# EAGLE board MCU board ATmega328p v2.4 (EAGLE 9.2.0)

Size 160 x 100 mm. Coordinates in mm from the lower left corner, seen from the top.
Outline: 0,0 160,0 160,100 0,100 0,0
Copper layers (1*2*3*4): Top 0.035mm / dielectric 0.432mm / Route2 0.017mm / dielectric 0.432mm / Route3 0.017mm / dielectric 0.432mm / Route4 0.035mm
Design rules "JLC_4L_ACM_CAN": minimum track width 8mil, minimum drill 20mil, track to track 8mil, track to pad 8mil, pad to pad 8mil, via to via 8mil, smd to smd 8mil, copper to edge 10mil, drill to drill 8mil, minimum pad ring 12mil, minimum via ring 10mil, stop-mask expansion 4mil, vias tented up to drill 25mil, thermal gap 10mil

## Footprints (pad centres in the part's own frame; a part is rotated, then mirrored left to right if it is on the bottom)
2,54/1,0 = drill 1.016 pad 2.54 octagon: 1 0,0
C0603 = smd 1.1 x 1: 1 -0.85,0; 2 0.85,0
0154001.DRT = smd 4.242 x 3.81: 1 -3.188,0; 2 3.188,0
QFN45P400X400X100-29N = smd 0.7 x 0.25: 1 -2.05,1.35; 2 -2.05,0.9; 3 -2.05,0.45; 4 -2.05,0; 5 -2.05,-0.45; 6 -2.05,-0.9; 7 -2.05,-1.35; 15 2.05,-1.35; 16 2.05,-0.9; 17 2.05,-0.45; 18 2.05,0; 19 2.05,0.45; 20 2.05,0.9; 21 2.05,1.35 | smd 0.25 x 0.7: 8 -1.35,-2.05; 9 -0.9,-2.05; 10 -0.45,-2.05; 11 0,-2.05; 12 0.45,-2.05; 13 0.9,-2.05; 14 1.35,-2.05; 22 1.35,2.05; 23 0.9,2.05; 24 0.45,2.05; 25 0,2.05; 26 -0.45,2.05; 27 -0.9,2.05; 28 -1.35,2.05 | smd 2.45 x 2.45: 29 0,0
SOT230P700X170-4N = smd 1.75 x 0.95: 1 -3.15,2.3; 2 -3.15,0; 3 -3.15,-2.3 | smd 1.75 x 3.25: 4 3.15,0
QFN65P600X600X100-29N = smd 1.05 x 0.35: 1 -2.85,1.95; 2 -2.85,1.3; 3 -2.85,0.65; 4 -2.85,0; 5 -2.85,-0.65; 6 -2.85,-1.3; 7 -2.85,-1.95; 15 2.85,-1.95; 16 2.85,-1.3; 17 2.85,-0.65; 18 2.85,0; 19 2.85,0.65; 20 2.85,1.3; 21 2.85,1.95 | smd 0.35 x 1.05: 8 -1.95,-2.85; 9 -1.3,-2.85; 10 -0.65,-2.85; 11 0,-2.85; 12 0.65,-2.85; 13 1.3,-2.85; 14 1.95,-2.85; 22 1.95,2.85; 23 1.3,2.85; 24 0.65,2.85; 25 0,2.85; 26 -0.65,2.85; 27 -1.3,2.85; 28 -1.95,2.85 | smd 4.2 x 4.2: 29 0,0
2X3-NS = drill 1.016 pad 1.88: 1 -2.54,-1.27; 2 -2.54,1.27; 3 0,-1.27; 4 0,1.27; 5 2.54,-1.27; 6 2.54,1.27
ROHM-1510-(0604) = smd 0.45 x 0.45: 1 -0.675,-0.425; 3 0.675,-0.425; 4 0.675,0.425; 6 -0.675,0.425 | smd 0.4 x 0.45: 2 0,-0.425; 5 0,0.425
R0603 = smd 1 x 1.1: 1 -0.85,0; 2 0.85,0
SMD1,27-2,54 = smd 1.27 x 2.54: 1 0,0
CSTNE16M0V530000R0 = smd 0.4 x 1.9: 1 -1.2,0.425; 2 0,0.425; 3 1.2,0.425

## Placement (x,y rotation side)
12V  12V  [2,54/1,0]  -6.35,44.45 0 top  (outside the outline)
C1  0.1uF  [C0603]  -140,-158.2 0 top  (outside the outline)
C2  22pF  [C0603]  -111.4,-87.8 0 top  (outside the outline)
C3  22pF  [C0603]  -111.7,-92.7 0 top  (outside the outline)
C5  22pF  [C0603]  -72.49,-29.19 0 top  (outside the outline)
C6  0.1uF  [C0603]  -72.6,-32.7 0 top  (outside the outline)
C7  0.1uF  [C0603]  -72.6,-48.6 0 top  (outside the outline)
C8  0.1uF  [C0603]  -72.6,-53.5 0 top  (outside the outline)
C9  22pF  [C0603]  -112,-97.6 0 top  (outside the outline)
C10  10uF  [C0603]  -112.3,-102.5 0 top  (outside the outline)
C11  10uF  [C0603]  -72.6,-82.9 0 top  (outside the outline)
C12  0.1uF  [C0603]  -72.6,-58.4 0 top  (outside the outline)
C13  0.1uF  [C0603]  -72.6,-63.3 0 top  (outside the outline)
C16  0.1uF  [C0603]  -72.6,-68.2 0 top  (outside the outline)
C17  0.1uF  [C0603]  -72.6,-73.1 0 top  (outside the outline)
F1  0154005.DRT  [0154001.DRT]  13.97,46.99 0 top
GND  GND  [2,54/1,0]  -139.7,-164 0 top  (outside the outline)
I/O_AD0  I/O_AD0  [2,54/1,0]  -110.4,-82.3 0 top  (outside the outline)
I/O_AD1  I/O_AD1  [2,54/1,0]  -139,-128.2 0 top  (outside the outline)
I/O_ADC2_SDA  I/O_ADC2_SDA  [2,54/1,0]  -105.6,-82.3 0 top  (outside the outline)
I/O_ADC3_SCL  I/O_ADC3_SCL  [2,54/1,0]  -100.8,-82.3 0 top  (outside the outline)
I/O_CANH  I/O_CANH  [2,54/1,0]  -36.83,26.67 0 top  (outside the outline)
I/O_CANL  I/O_CANH  [2,54/1,0]  -43.18,26.67 0 top  (outside the outline)
I/O_PWM0  I/O_PWM0  [2,54/1,0]  -134.1,-128.2 0 top  (outside the outline)
I/O_PWM1_INT1  I/O_PWM0_INT  [2,54/1,0]  -17.78,26.67 0 top  (outside the outline)
IC1  ATMEGA328P-MMH  [QFN45P400X400X100-29N]  12.7,30.48 0 top
IC2  MIC5239-5.0YS_TR  [SOT230P700X170-4N]  39.37,41.91 0 top
IC3  MCP25625-E_ML  [QFN65P600X600X100-29N]  13.97,20.32 0 top
J1  AVR_SPI_PROG_3X2NS  [2X3-NS]  12.7,6.35 0 top
LED1  SMLP36RGB2W3R  [ROHM-1510-(0604)]  -123.3,-115.4 0 top  (outside the outline)
MISO  MISO  [2,54/1,0]  -81.3,-82.3 0 top  (outside the outline)
MOSI  MOSI  [2,54/1,0]  -86.1,-82.3 0 top  (outside the outline)
R1  10kOhm  [R0603]  -72.6,-37.6 0 top  (outside the outline)
R2  200Ohm  [R0603]  -130.2,-119 0 top  (outside the outline)
R3  10kOhm  [R0603]  -72.6,-78 0 top  (outside the outline)
R4  290Ohm  [R0603]  -130.2,-123.9 0 top  (outside the outline)
R5  190Ohm  [R0603]  -130.2,-128.8 0 top  (outside the outline)
R6  200Ohm  [R0603]  -140,-133.7 0 top  (outside the outline)
R7  200Ohm  [R0603]  -140,-138.6 0 top  (outside the outline)
R8  200Ohm  [R0603]  -140,-143.5 0 top  (outside the outline)
R9  200Ohm  [R0603]  -140,-148.4 0 top  (outside the outline)
R10  200Ohm  [R0603]  -140,-153.3 0 top  (outside the outline)
RES_PAD1  RES_PAD  [SMD1,27-2,54]  -13.97,3.81 0 top  (outside the outline)
RES_PAD2  RES_PAD2  [SMD1,27-2,54]  -17.78,3.81 0 top  (outside the outline)
SCK  SCK  [2,54/1,0]  -76.5,-82.3 0 top  (outside the outline)
U1  CSTNE16M0V530000R0  [CSTNE16M0V530000R0]  -109.9,-107.4 0 top  (outside the outline)
U2  CSTNE16M0V530000R0  [CSTNE16M0V530000R0]  -116.6,-112 0 top  (outside the outline)

## Library data of the parts
12V GND I/O_AD0 I/O_AD1 I/O_ADC2_SDA I/O_ADC3_SCL I/O_CANH I/O_CANL I/O_PWM0 I/O_PWM1_INT1 MISO MOSI RES_PAD1 RES_PAD2 SCK = wirepad
C1-C3 C5-C13 C16 C17 = eagle-ltspice; SPICEMODEL: NONE; SPICEPREFIX: C
F1 = 0154005(Fuseholder)DRT; ALLIED_NUMBER: 70184875; ALLIED_PRICE-STOCK: https://www.alliedelec.com/littelfuse-0154005-drt/70184875/; ARROW_PART_NUMBER: 0154005.DRT; ARROW_PRICE-STOCK: https://www.arrow.com/en/products/0154005.drt/littelfuse; DESCRIPTION: Littelfuse 5A T Surface Mount Fuse, 125V ac/dc; HEIGHT: mm; MANUFACTURER_NAME: LITTELFUSE; MANUFACTURER_PART_NUMBER: 0154005.DRT; RS_PART_NUMBER: 2196260P; RS_PRICE-STOCK: http://uk.rs-online.com/web/p/products/2196260P
IC1 = ATMEGA328P-MMH; ARROW_PART_NUMBER: ATMEGA328P-MMH; ARROW_PRICE-STOCK: https://www.arrow.com/en/products/atmega328p-mmh/microchip-technology; DESCRIPTION: Atmel ATMEGA328P-MMH, 8bit AVR Microcontroller, 20MHz, 32 kB Flash, 28-Pin QFN; HEIGHT: 1mm; MANUFACTURER_NAME: Microchip; MANUFACTURER_PART_NUMBER: ATMEGA328P-MMH; RS_PART_NUMBER: 1310272P; RS_PRICE-STOCK: http://uk.rs-online.com/web/p/products/1310272P
IC2 = MIC5239-5.0YS_TR; ARROW_PART_NUMBER: MIC5239-5.0YS TR; ARROW_PRICE-STOCK: http://uk.rs-online.com/web/p/products/7275535P; DESCRIPTION: LDO Regulator Pos 5V 0.5A Micrel MIC5239-5.0YS TR, LDO Voltage Regulator, 500mA, 5 V 1%, 2.3 30 Vin, 3 + Tab-Pin SOT-223; HEIGHT: 1.7mm; MANUFACTURER_NAME: Micrel; MANUFACTURER_PART_NUMBER: MIC5239-5.0YS TR; RS_PART_NUMBER: 7275535P; RS_PRICE-STOCK: http://uk.rs-online.com/web/p/products/7275535P
IC3 = MCP25625-E_ML; ALLIED_NUMBER: 70431541; ALLIED_PRICE-STOCK: http://www.alliedelec.com/microchip-technology-inc-mcp25625-e-ml/70431541/; ARROW_PART_NUMBER: MCP25625-E/ML; ARROW_PRICE-STOCK: https://www.arrow.com/en/products/mcp25625-eml/microchip-technology; DESCRIPTION: CAN Controller with Transceiver QFN28 Microchip MCP25625-E/ML, CAN Controller, 28-Pin QFN; HEIGHT: 1mm; MANUFACTURER_NAME: Microchip; MANUFACTURER_PART_NUMBER: MCP25625-E/ML; RS_PART_NUMBER: 1654104; RS_PRICE-STOCK: http://uk.rs-online.com/web/p/products/1654104
J1 = SparkFun-Connectors
LED1 = SMLP36RGB2W3R; ARROW_PART_NUMBER: SMLP36RGB2W3R; ARROW_PRICE-STOCK: https://www.arrow.com/en/products/smlp36rgb2w3r/rohm-semiconductor; DESCRIPTION: LED,RGB,35/110/35mcd,top-looking,1510 ROHM SMLP36RGB2W3R, SML-P36 Series 3 RGB LED, 475 (Blue) nm, 535 (Green) nm, 629 (Red) nm 6-Pin Milky White; HEIGHT: mm; MANUFACTURER_NAME: ROHM Semiconductor; MANUFACTURER_PART_NUMBER: SMLP36RGB2W3R; RS_PART_NUMBER: 1246884P; RS_PRICE-STOCK: http://uk.rs-online.com/web/p/products/1246884P
R1-R10 = eagle-ltspice; SPICEMODEL: NONE; SPICEPREFIX: R
U1 U2 = CSTNE16M0V530000R0; ARROW_PART_NUMBER: CSTNE16M0V530000R0; ARROW_PRICE-STOCK: https://www.arrow.com/en/products/cstne16m0v530000r0/murata-manufacturing; DESCRIPTION: Resonators 16.0000MHz 15pF SMD CHP Resntr; HEIGHT: 1mm; MANUFACTURER_NAME: Murata Electronics; MANUFACTURER_PART_NUMBER: CSTNE16M0V530000R0

## Nets
5V: C6.1 C7.1 C8.1 C11.1 C12.1 C13.1 C16.1 C17.1 IC1.3 IC1.16 IC1.17 IC2.3 IC3.3 IC3.11 IC3.19 J1.2 LED1.4 LED1.5 LED1.6 R1.1 R3.2
12V_FUSED: C10.1 F1.2 IC2.1 R9.2
12V_UNFUSED: 12V.1 F1.1
BLUE_LED: IC1.11 R5.1
CAN_CS: IC1.9 IC3.1
CAN_INT: IC1.28 IC3.25
CAN_OSC1: C5.1 IC3.21 U1.1
CAN_OSC2: C2.1 IC3.20 U1.3
CANH: I/O_CANH.1 IC3.13
CANL: I/O_CANL.1 IC3.12
GND: C1.2 C2.2 C3.2 C5.2 C6.2 C7.2 C8.2 C9.2 C10.2 C11.2 C12.2 C13.2 C16.2 C17.2 GND.1 IC1.4 IC1.18 IC1.29 IC2.2 IC2.4 IC3.14 IC3.15 IC3.17 IC3.18 IC3.22 J1.6 R10.1 RES_PAD2.1 U1.2 U2.2
GREEN_LED: IC1.8 R2.1
I/O_D2_INT: I/O_PWM1_INT1.1 IC1.1
MCU_OSC1: C3.1 IC1.5 U2.1
MCU_OSC2: C9.1 IC1.6 U2.3
MISO: IC1.14 IC3.27 J1.1 R7.1
MOSI: IC1.13 IC3.28 J1.4 R8.1
N$1: IC3.2 R1.2
N$2: I/O_PWM0.1 IC1.12
N$3: I/O_AD1.1 IC1.21
N$4: LED1.1 R2.2
N$5: I/O_AD0.1 IC1.22
N$6: I/O_ADC2_SDA.1 IC1.23
N$7: I/O_ADC3_SCL.1 IC1.24
N$8: LED1.2 R4.2
N$9: LED1.3 R5.2
N$10: R6.2 SCK.1
N$11: MISO.1 R7.2
N$12: MOSI.1 R8.2
RED_LED: IC1.7 R4.1
RESET_MCU: IC1.25 J1.5 R3.1 RES_PAD1.1
RXCAN: IC3.5 IC3.10
SCK: IC1.15 IC3.26 J1.3 R6.1
TXCAN: IC3.4 IC3.16
VOLTAGE_CHECK: C1.1 IC1.19 R9.1 R10.2

## Tracks (layer width: path | path; a pad name or v marks a point on that pad's centre or on a via)
5V  (20 unrouted)
12V_FUSED  (3 unrouted)
12V_UNFUSED  (1 unrouted)
BLUE_LED  (1 unrouted)
CAN_CS  (1 unrouted)
CAN_INT  (1 unrouted)
CAN_OSC1  (2 unrouted)
CAN_OSC2  (2 unrouted)
CANH  (1 unrouted)
CANL  (1 unrouted)
GND  (29 unrouted)
GREEN_LED  (1 unrouted)
I/O_D2_INT  (1 unrouted)
MCU_OSC1  (2 unrouted)
MCU_OSC2  (2 unrouted)
MISO  (3 unrouted)
MOSI  (3 unrouted)
N$1  (1 unrouted)
N$2  (1 unrouted)
N$3  (1 unrouted)
N$4  (1 unrouted)
N$5  (1 unrouted)
N$6  (1 unrouted)
N$7  (1 unrouted)
N$8  (1 unrouted)
N$9  (1 unrouted)
N$10  (1 unrouted)
N$11  (1 unrouted)
N$12  (1 unrouted)
RED_LED  (1 unrouted)
RESET_MCU  (3 unrouted)
RXCAN  (1 unrouted)
SCK  (3 unrouted)
TXCAN  (1 unrouted)
VOLTAGE_CHECK  (3 unrouted)